# Altium PCB omnibothub-power-one.PcbDoc
Units mil, origin at the board's own origin, x right, y up, seen from the top; angles counter-clockwise.
Board outline 1230.8 x 3070.8 mil, 2 copper layers (Top Layer, Bottom Layer); 7 components, 5 nets, 21 pads, 6 vias.
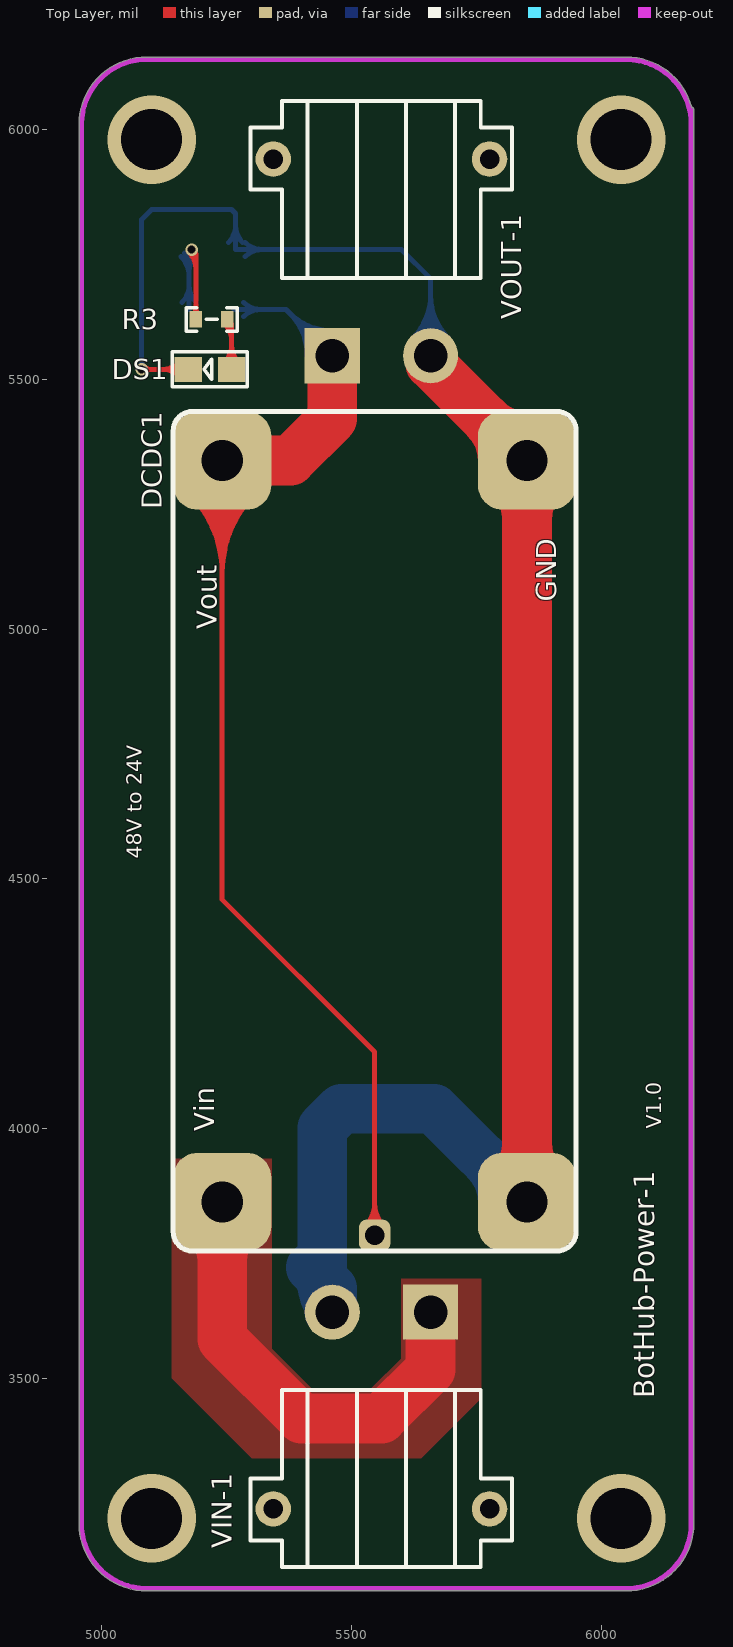
[diagram p0: Top Layer view]
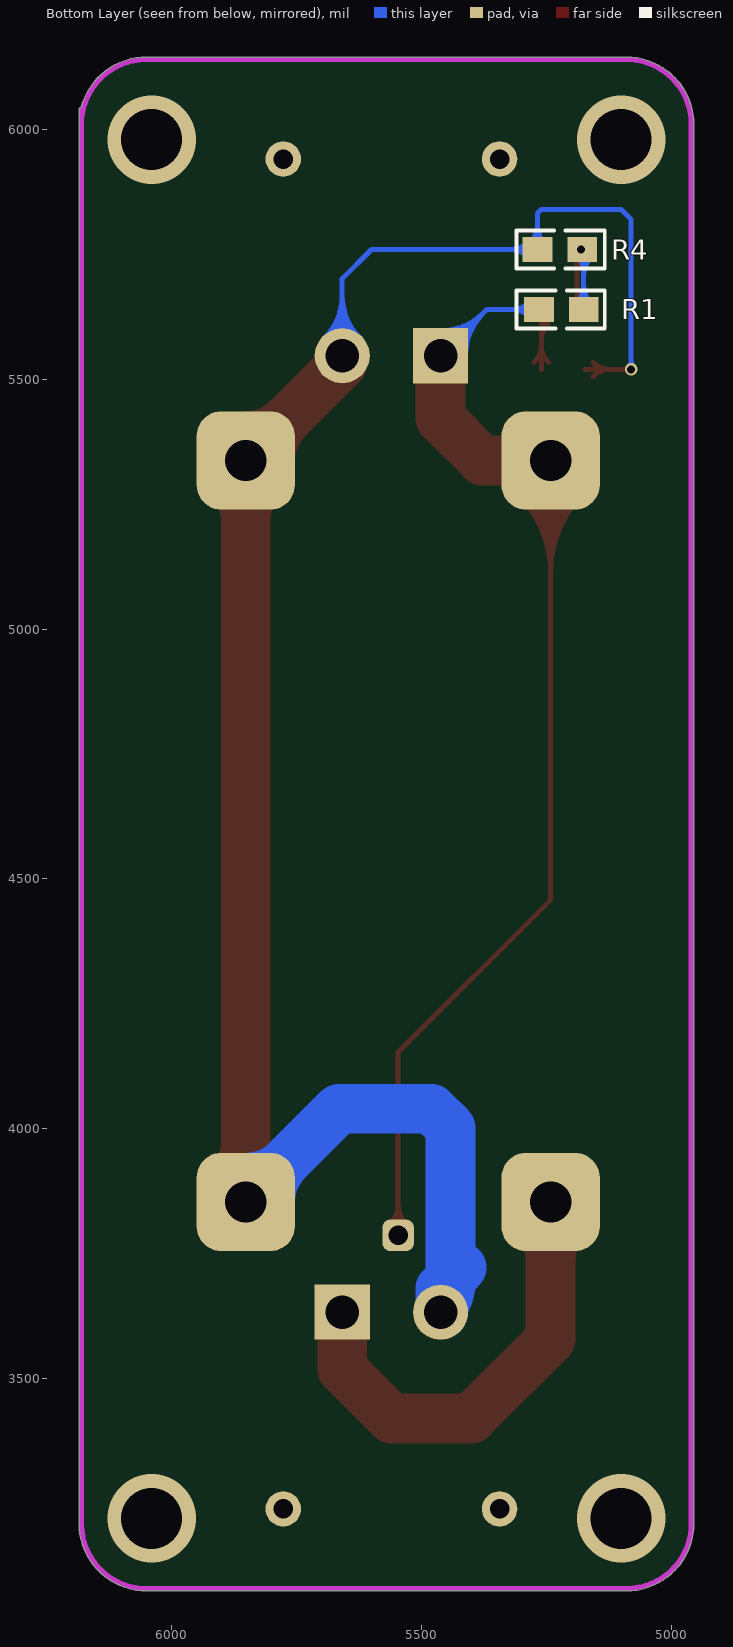
[diagram p1: Bottom Layer view, seen from below]

## Layer stack, top to bottom
Top Layer: signal copper 1.4
Dielectric: core 12.6, FR-4, Dk 4.8
Bottom Layer: signal copper 1.4

## Board outline
4955,3199.62 cw(c4960,3200) 4954.98,3200 4954.98,5999.81 cw(c5090,6010) 4955,6020.38 cw(c5090,6010) 5079.62,6145 cw(c5080,6140) 5080,6145.02 6039.81,6145.02 cw(c6050,6010) 6060.38,6145 cw(c6050,6010) 6180.81,6044.95 cw(c6180,6040) 6185.02,6040 6185.02,3220.19 cw(c6050,3210) 6185.4,3210 cw(c6050,3210) 6185,3199.62 cw(c6050,3210) 6060.38,3075 cw(c6060,3080) 6060,3074.99 5100.19,3074.99 cw(c5090,3210) 5079.62,3075 cw(c5090,3210)

## Design rules (kind name [scope] priority, off if disabled: settings)
Clearance Clearance_3 [(InPolygon) vs InNet('VCC_DJ')] p1: gap=30
Clearance Clearance_2 [(InPolygon) vs InNet('POWER')] p2: gap=30
Clearance Clearance_1 [(InPolygon)] p3: gap=10
Clearance [All] p4: gap=6
PlaneConnect [All] p1: planeconnectstyle=Direct reliefexpansion=20 reliefentries=4 reliefconductorwidth=10 reliefairgap=10
PolygonConnect [All] p1: connectstyle=Direct reliefconductorwidth=10 reliefentries=4 polygonreliefangle="90 Angle"
RoutingVias [All] p1: holewidth=28 width=50 viastyle="Through Hole" minholewidth=16 minwidth=25 maxholewidth=28 maxwidth=50
SilkscreenOverComponentPads [All] p1: minsilkscreentomaskgap=10
SolderMaskExpansion [All] p1: expansion=4
TestPointUsage FabricationTestPointUsage [All] p1: valid=0 allowmultiple=FALSE
Testpoint FabricationTestpoint [All] p1: side=3 testpointundercomponent=TRUE minsize=40 maxsize=100 preferedsize=60 minholesize=0 maxholesize=40 preferedholesize=32 testpointgrid=1 style=297 order=0-112345678
Width [All] p1: maxlimit=100 minlimit=10 preferedwidth=10 minimp=50.000000 maximp=50.000000 favimp=50.000000
22 further rules are at their usual default settings.

## Components (designator, comment, footprint, x,y, rotation, side; value= is the part's Value field where it differs from the comment)
DCDC1 "Header 2X2" DCDC-1 5480,4500 r90 top locked
DS1 "LED1" SMDLED 5260,5520 r180 top
R1 "10K" R0805 5220,5640 r180 bottom
R3 "560R" R0603 5220,5620 r180 top
R4 "3K" R0805 5223,5760 r0 bottom
VIN-1 "Header 2" AMASS-XT30PW-M 5560,3300 r180 top
VOUT-1 "Header 2" AMASS-XT30PW-M 5560,5880 r0 top

## Footprints (in the part's own frame and the unit in brackets; to place one, negate y for a bottom-side part, rotate by r counter-clockwise, add the part's x,y. Pads: shape width x height; smd on the part's side, far side on the other; paste and mask are expansions set on the pad)
AMASS-XT30PW-M [mm] "TH, 4-Leads, Body 13.95x13.3mm"
  rect 2.8x2.8 hole 1.7: 1(-2.5,-8.45)
  round 2.8 hole 1.7: 2(2.5,-8.45)
  round 1.8 hole 1: MP1(-5.5,1.55) MP2(5.5,1.55)
  silkscreen extent -6.65,-4.5 6.65,4.5
DCDC-1 [mm] "TH, 4-Leads, Body 13.95x13.3mm"
  rrect50% 5x5 hole 2.1: 1(-16.423,6.062) 2(21.277,6.062) 3(-16.423,-9.438) 4(21.277,-9.438)
  rrect50% 1.6x1.6 hole 1: 2(-18.123,-1.688)
  silkscreen extent -18.92,-11.94 23.78,8.56
R0603 [mil] "МщЖ"
  rect 25x33 smd: 1(-31.5,0) 2(31.5,0)
  silkscreen extent -51,-24 51,24, body extent -32,-16 32,16, height 20
R0805 [mil]
  rect 60x50 smd: 1(45,0) 2(-45,0)
  silkscreen extent -90,-38 87,38
SMDLED [mm]
  rect 1.4x1.27 smd: 1(0.001,-0.002) 2(2.211,-0.002)
  silkscreen extent -0.8,-0.89 3.01,0.89

## Part data
DCDC1: "Header, 2-Pin, Dual row"
DS1: library part LED2, "Typical RED, GREEN, YELLOW, AMBER GaAs LED"
R1 R3 R4: library part Res2, "0603"
VIN-1 VOUT-1: "Header, 2-Pin"

## Via types
v1: diameter 177.17, hole 122.05, Top Layer to Bottom Layer, 4 vias
v2: diameter 25, hole 16, Top Layer to Bottom Layer, 2 vias

## Nets (pads, with @x,y where several pads share a name; then routed paths per layer and width w, separated by ;. In a path a pad name is that pad's centre, name@x,y a point inside that pad or via, vN(x,y) a via of type N, cw(c..) or ccw(c..) an arc to the next point about the centre after c; other vN are vias at no path point)
GND: DCDC1.3 DCDC1.4 DS1.2 R4.1 VIN-1.2 VOUT-1.2 | length 5589.2
  Top Layer w10: v2(5080,5520) 5080.06,5520.06 DS1.2 ; v2@5085.3,5514.7 cw(c5098.26,5501.74) 5098.26,5520.06 ; v2@5085.3,5525.3 ccw(c5097.95,5537.95) 5097.95,5520.06 ; DS1.2@5156.26,5505.92 ccw(c5122.12,5471.78) 5122.12,5520.06 ccw(c5122.12,5568.35) DS1.2@5156.26,5534.21
  Top Layer w100: VOUT-1.2 5658.43,5530.83 DCDC1.4 5851.57,4560 DCDC1.3 ; DCDC1.4@5803.15,5337.68 ccw(c5686.24,5337.68) 5768.91,5420.34 ccw(c5851.57,5503.01) DCDC1.4@5851.57,5386.1 ; DCDC1.3@5817.33,3887.67 ccw(c5734.67,3970.33) 5851.57,3970.33 ccw(c5968.48,3970.33) DCDC1.3@5885.82,3887.67 ; DCDC1.4@5817.33,5303.44 cw(c5734.67,5220.77) 5851.57,5220.77 cw(c5968.48,5220.77) DCDC1.4@5885.82,5303.44
  Bottom Layer w10: v2@5074.7,5525.3 ccw(c5061.89,5538.11) 5080,5538.11 ccw(c5098.11,5538.11) v2@5085.3,5525.3 ; v2(5080,5520) 5080,5820 5100,5840 5260,5840 5268,5832 R4.1 5600,5760 5658.43,5701.57 VOUT-1.2 ; R4.1@5253.86,5774.14 ccw(c5219.72,5808.28) 5268,5808.28 ccw(c5316.28,5808.28) R4.1@5282.14,5774.14 ; R4.1@5287.14,5745.86 cw(c5321.28,5711.72) 5321.28,5760 cw(c5321.28,5808.28) R4.1@5287.14,5774.14 ; VOUT-1.2@5622.99,5582.76 ccw(c5537.43,5668.32) 5658.43,5668.32 ccw(c5779.42,5668.32) VOUT-1.2@5693.86,5582.76 ; VOUT-1.2@5630.06,5575.69 ccw(c5561.57,5644.18) 5658.43,5644.18 ccw(c5755.28,5644.18) VOUT-1.2@5686.79,5575.69 ; VOUT-1.2@5637.13,5568.62 ccw(c5585.71,5620.03) 5658.43,5620.03 ccw(c5731.14,5620.03) VOUT-1.2@5679.72,5568.62
  Bottom Layer w100: 5419.38,3722.2 cw(c5329.85,3632.68) VIN-1.2@5456.46,3632.68 ; VIN-1.2 5461.57,3680 5441.57,3700 5441.57,4001.57 5480,4040 5665,4040 DCDC1.3 ; DCDC1.3@5803.15,3853.43 ccw(c5686.24,3853.43) 5768.91,3936.09 ccw(c5851.57,4018.76) DCDC1.3@5851.57,3901.85 ; 5441.57,3693.32 ccw(c5522.22,3693.32) 5465.19,3636.3 cw(c5522.22,3693.32) 5441.57,3693.32
NetDS1_1: DS1.1 R3.1 | length 234.2
  Top Layer w10: DS1.1@5245.83,5534.21 ccw(c5211.68,5568.35) 5259.97,5568.35 ccw(c5308.25,5568.35) DS1.1@5274.11,5534.21 ; R3.1@5246.2,5610.7 cw(c5212.95,5577.45) 5259.97,5577.45 ; R3.1 5259.97,5611.53 DS1.1 ; R3.1@5253.27,5617.77 cw(c5237.09,5601.59) 5259.97,5601.59
NetR1_1: R1.1 R3.2 R4.2 | length 551.9
  Top Layer w10: v2@5174.7,5754.7 cw(c5141.37,5721.37) 5188.5,5721.37 ; v2(5180,5760) 5188.5,5751.5 R3.2 ; v2@5181.77,5761.77 cw(c5165.51,5745.51) 5188.5,5745.51 ; R3.2@5183.2,5629.3 ccw(c5170.39,5642.11) 5188.5,5642.11 ccw(c5206.61,5642.11) R3.2@5193.8,5629.3
  Bottom Layer w10: R4.2@5158.86,5745.86 cw(c5119.89,5706.89) 5175,5706.89 ; R1.1@5160.86,5654.14 ccw(c5126.72,5688.28) 5175,5688.28 ccw(c5223.28,5688.28) R1.1@5189.14,5654.14 ; R4.2@5165.93,5752.93 cw(c5144.03,5731.03) 5175,5731.03 ; R1.1 5175,5757 R4.2 ; 5175,5716.54 cw(c5216.46,5716.54) R4.2@5187.14,5745.86 ; 5175,5729.82 cw(c5210.18,5729.82) R4.2@5185.3,5754.7
V24-1: DCDC1.2 R1.2 VOUT-1.1 | length 4545.5
  Top Layer w10: DCDC1.2@5175.28,5271.62 cw(c5015.79,5112.13) 5241.34,5112.13 cw(c5466.89,5112.13) DCDC1.2@5307.4,5271.62 ; DCDC1.2@5182.35,5278.69 cw(c5039.93,5136.27) 5241.34,5136.27 cw(c5442.74,5136.27) DCDC1.2@5300.33,5278.69 ; DCDC1.2@5189.42,5285.76 cw(c5064.07,5160.41) 5241.34,5160.41 cw(c5418.6,5160.41) DCDC1.2@5293.26,5285.76 ; DCDC1.2@5196.49,5292.83 cw(c5088.22,5184.56) 5241.34,5184.56 cw(c5394.46,5184.56) DCDC1.2@5286.19,5292.83 ; DCDC1.2@5203.56,5299.9 cw(c5112.36,5208.7) 5241.34,5208.7 cw(c5370.32,5208.7) DCDC1.2@5279.12,5299.9 ; DCDC1.2@5210.63,5306.97 cw(c5136.5,5232.84) 5241.34,5232.84 cw(c5346.18,5232.84) DCDC1.2@5272.04,5306.97 ; DCDC1.2@5241.34,5337.68 5241.34,4458.66 5546.46,4153.54 DCDC1.2@5546.46,3786.5 ; DCDC1.2@5527.72,3805.23 ccw(c5482.49,3850.46) 5546.46,3850.46 ccw(c5610.42,3850.46) DCDC1.2@5565.19,3805.23 ; DCDC1.2@5534.79,3798.16 ccw(c5506.63,3826.32) 5546.46,3826.32 ccw(c5586.28,3826.32) DCDC1.2@5558.12,3798.16
  Top Layer w100: DCDC1.2@5241.34,5337.68 5377.68,5337.68 5461.57,5421.57 VOUT-1.1
  Bottom Layer w10: R1.2 5368.9,5640 VOUT-1.1 ; R1.2@5284.14,5625.86 cw(c5318.28,5591.72) 5318.28,5640 cw(c5318.28,5688.28) R1.2@5284.14,5654.14 ; VOUT-1.1@5411.46,5547.32 ccw(c5290.46,5547.32) 5376.02,5632.88 ccw(c5461.57,5718.44) VOUT-1.1@5461.57,5597.44 ; VOUT-1.1@5421.46,5547.32 ccw(c5324.6,5547.32) 5393.09,5615.81 ccw(c5461.57,5684.29) VOUT-1.1@5461.57,5587.44 ; VOUT-1.1@5431.46,5547.32 ccw(c5358.75,5547.32) 5410.16,5598.74 ccw(c5461.57,5650.15) VOUT-1.1@5461.57,5577.44
V48: DCDC1.1 VIN-1.1 | length 1096.2
  Top Layer w100: DCDC1.1@5207.1,3819.18 cw(c5124.43,3736.52) 5241.34,3736.52 cw(c5358.25,3736.52) DCDC1.1@5275.58,3819.18 ; DCDC1.1 5241.34,3578.66 5400,3420 5560,3420 5658.43,3518.43 VIN-1.1
pads on no net: VIN-1.MP1 VIN-1.MP2 VOUT-1.MP1 VOUT-1.MP2
copper on no net: | length 1.9
  Top Layer w10: 5240,5336.34 5241.34,5337.68
  other v1: 5100,3220 6040,3220 5100,5980 6040,5980

## Polygon pours and split planes (outlines as drawn)
V48 on Top Layer "Keep-Out Layer-No Net" (solid): 5140,3940 5140,3520 5140,3500 5300,3340 5600,3340 5640,3340 5740,3440 5760,3460 5760,3700 5600,3700 5600,3540 5540,3480 5420,3480 5340,3560 5340,3940

## Keep-outs
Keep-Out Layer:
  lines w10: 4960,6000 cw(c5090,6010) 5080,6140 6060,6140 ; 4960,6020 4960,3200 ccw(c5090,3210) 5100,3080 ; 5080,3080 6060,3080 ccw(c6050,3210) 6180,3220 ; 6040,6140 cw(c6050,6010) 6180,6020 ; 6180,3200 6180,6040

## Silkscreen, mask and mechanical layers (free items; w line width, h text height)
Top Overlay:
  text "48V to 24V" at 5080,4540 h30 r90
  text "V1.0" at 6120,4000 h30 r90
  text "BotHub-Power-1" at 6120,3460 h70 r90

## Text inside footprints (layer, text, board x,y; h text height)
DCDC1: Top Overlay "Vin" at 5225,3995 h40 r90; Top Overlay "Vout" at 5230,5000 h40 r90; Top Overlay "GND" at 5910,5055 h40 r90